# Altium PCB PCB1.PcbDoc
Units mm, origin at the board's own origin, x right, y up, seen from the top; angles counter-clockwise.
Board outline 105 x 105 mm, 2 copper layers (Top Layer, Bottom Layer); 85 components, 81 nets, 290 pads, 90 vias.
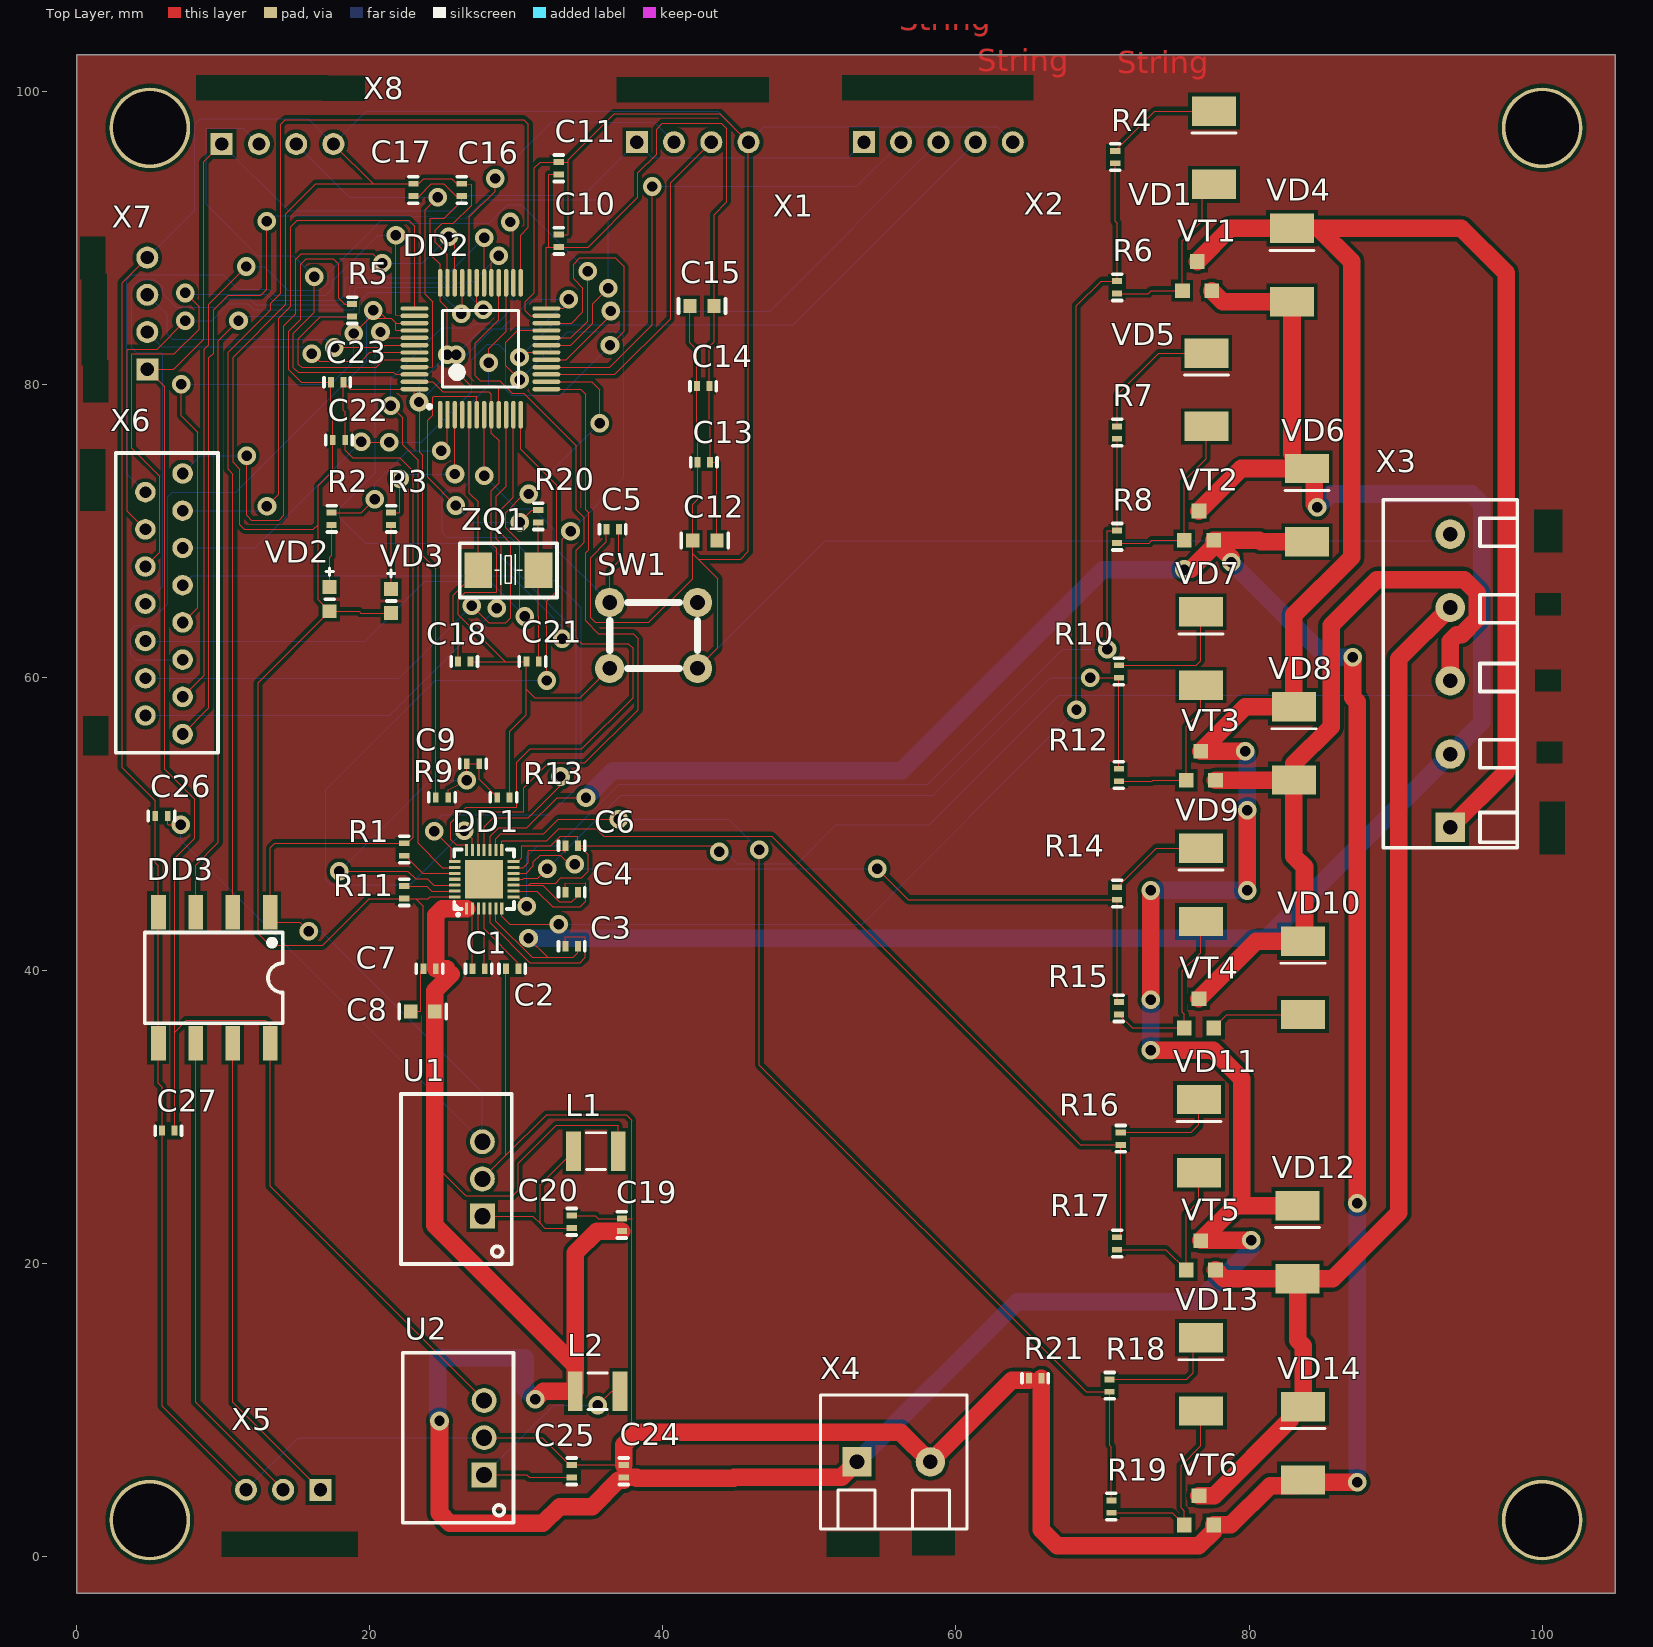
[diagram p0: Top Layer view]
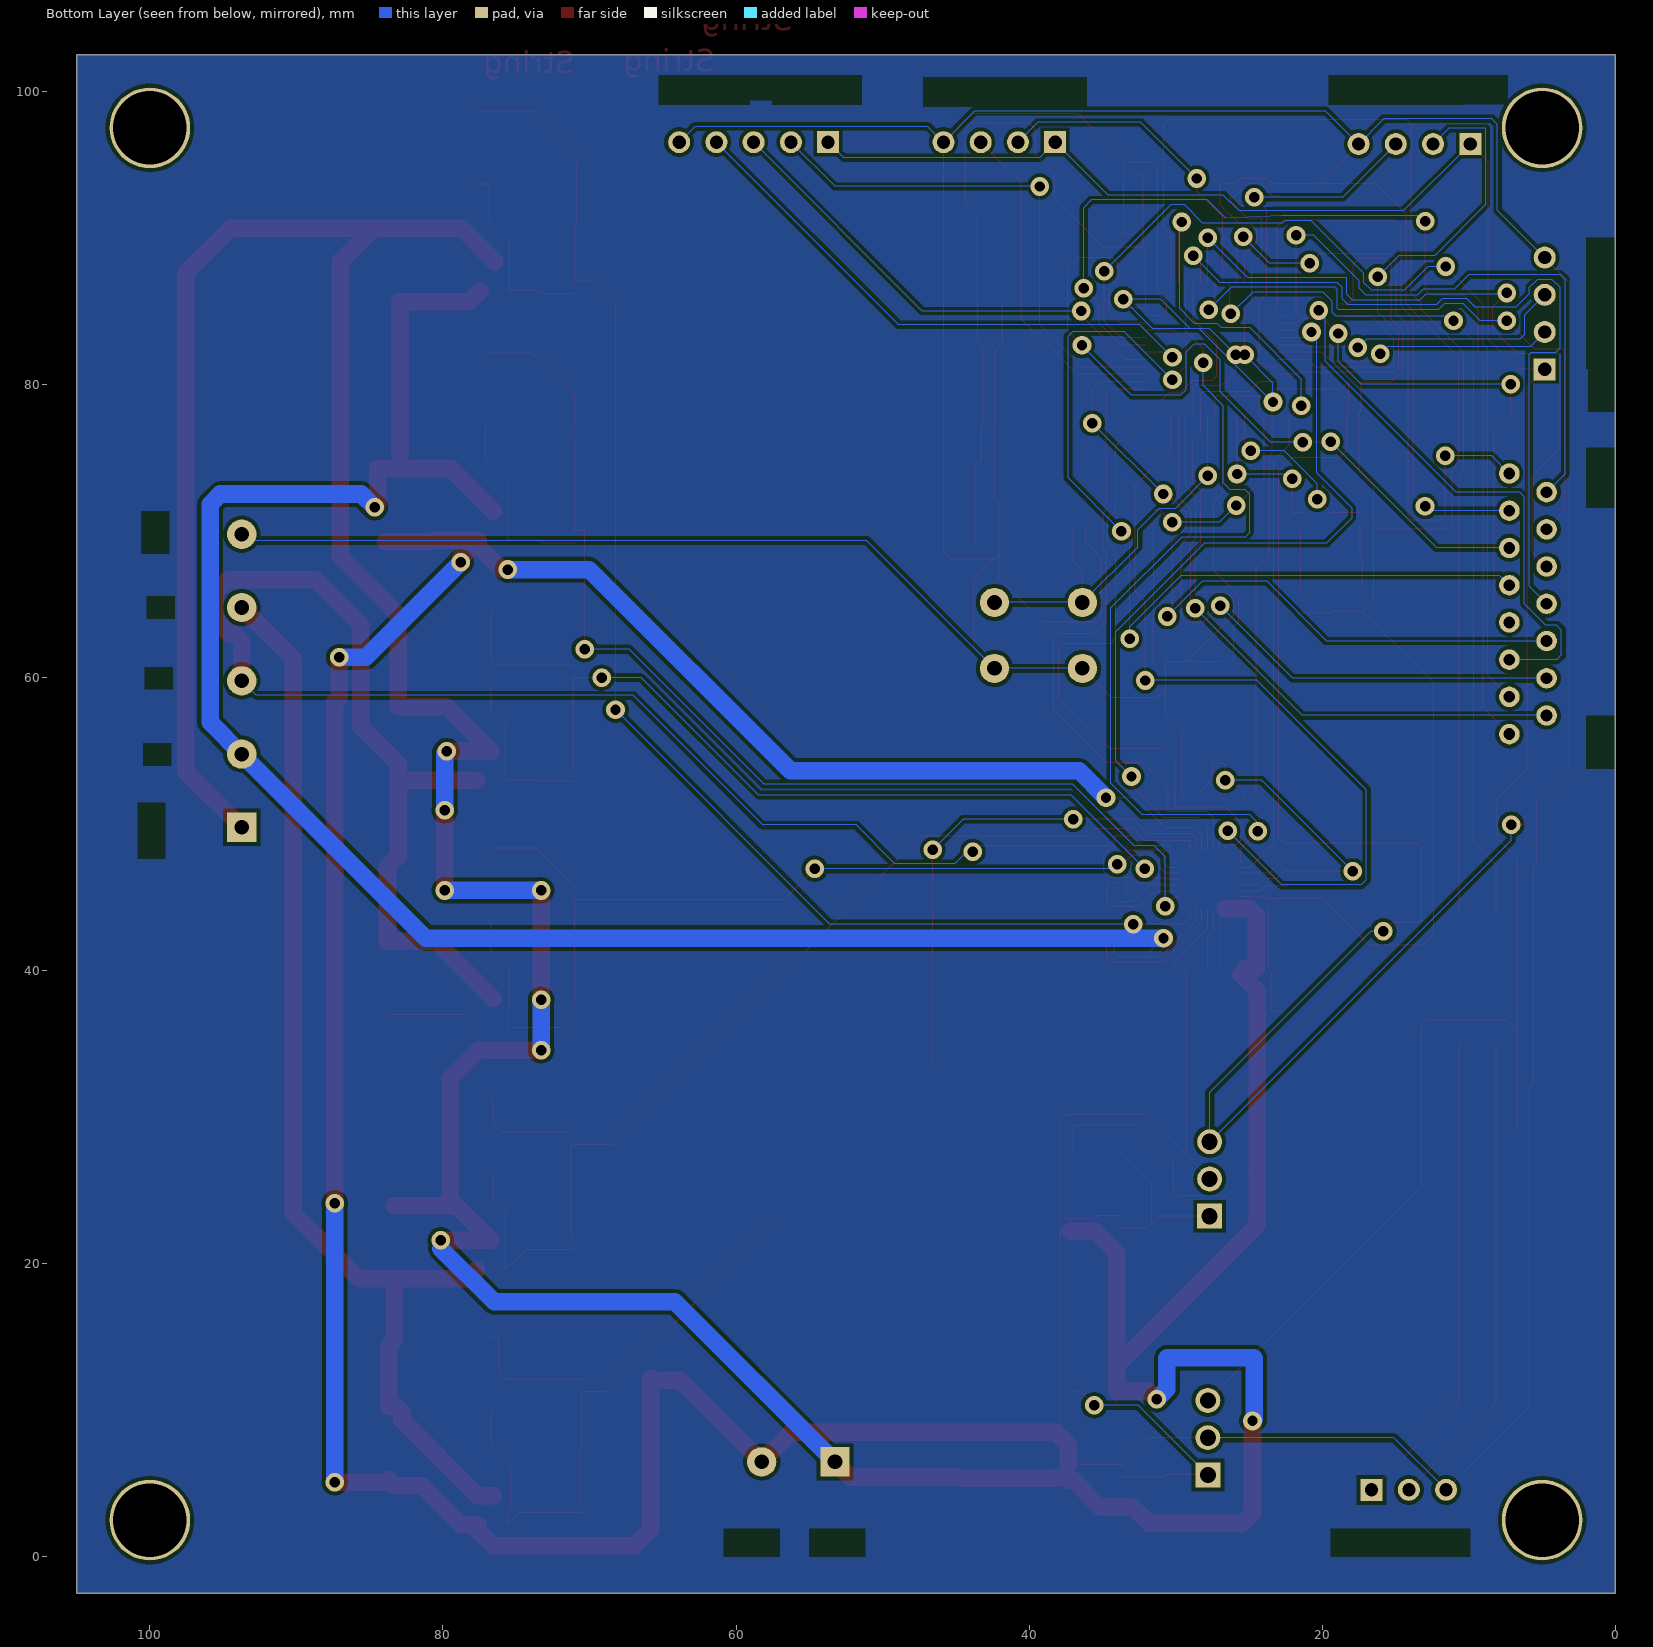
[diagram p1: Bottom Layer view, seen from below]

## Layer stack, top to bottom
Top Solder: solder mask 0.0102, Solder Resist, Dk 3.5
Top Layer: signal copper 0.0356
Dielectric 1: dielectric 0.32, FR-4, Dk 4.8
Bottom Layer: signal copper 0.0356
Bottom Solder: solder mask 0.0102, Solder Resist, Dk 3.5

## Board outline
0,-2.5 0,102.5 105,102.5 105,-2.5

## Design rules (kind name [scope] priority, off if disabled: settings)
Clearance [All] p1: gap=0.254 ignorepadtopadclearanceinfootprint=FALSE
PolygonConnect [All] p1: connectstyle=Relief reliefconductorwidth=0.254 reliefentries=4 polygonreliefangle="90 Angle" airgapwidth=0.254
RoutingVias [All] p1: holewidth=0.711 width=1.27 viastyle="Through Hole" minholewidth=0.711 minwidth=1.27 maxholewidth=0.711 maxwidth=1.27
SolderMaskExpansion [All] p1: expansion=0.102 istentingtop=FALSE
SupplyNets "Schematic Supply Nets_51" [InNet('PB10')] p1: voltage=0.000
SupplyNets "Schematic Supply Nets_50" [InNet('PB4')] p2: voltage=0.000
SupplyNets "Schematic Supply Nets_49" [InNet('PB11')] p3: voltage=0.000
SupplyNets "Schematic Supply Nets_48" [InNet('PA9')] p4: voltage=0.000
SupplyNets "Schematic Supply Nets_47" [InNet('SWDIO')] p5: voltage=0.000
SupplyNets "Schematic Supply Nets_46" [InNet('SDA2')] p6: voltage=0.000
SupplyNets "Schematic Supply Nets_45" [InNet('PA1')] p7: voltage=0.000
SupplyNets "Schematic Supply Nets_44" [InNet('PB2')] p8: voltage=0.000
SupplyNets "Schematic Supply Nets_43" [InNet('SDA1')] p9: voltage=0.000
SupplyNets "Schematic Supply Nets_42" [InNet('PA15')] p10: voltage=0.000
SupplyNets "Schematic Supply Nets_41" [InNet('PA10')] p11: voltage=0.000
SupplyNets "Schematic Supply Nets_40" [InNet('SCL1')] p12: voltage=0.000
SupplyNets "Schematic Supply Nets_39" [InNet('SCL2')] p13: voltage=0.000
SupplyNets "Schematic Supply Nets_38" [InNet('PA4')] p14: voltage=0.000
SupplyNets "Schematic Supply Nets_37" [InNet('PB3')] p15: voltage=0.000
SupplyNets "Schematic Supply Nets_36" [InNet('PB1')] p16: voltage=0.000
SupplyNets "Schematic Supply Nets_35" [InNet('SWCLK')] p17: voltage=0.000
SupplyNets "Schematic Supply Nets_34" [InNet('PA0')] p18: voltage=0.000
SupplyNets "Schematic Supply Nets_33" [InNet('PA8')] p19: voltage=0.000
SupplyNets "Schematic Supply Nets_7" [InNet('LSS')] p20: voltage=0.000
SupplyNets "Schematic Supply Nets_32" [InNet('CANH')] p21: voltage=0.000
SupplyNets "Schematic Supply Nets_31" [InNet('CAN_RX')] p22: voltage=0.000
SupplyNets "Schematic Supply Nets_2" [InNet('CANL')] p23: voltage=0.000
SupplyNets "Schematic Supply Nets" [InNet('CAN_TX')] p24: voltage=0.000
SupplyNets "Schematic Supply Nets_30" [InNet('INHC')] p25: voltage=0.000
SupplyNets "Schematic Supply Nets_29" [InNet('HPC')] p26: voltage=0.000
SupplyNets "Schematic Supply Nets_28" [InNet('+3V3')] p27: voltage=0.000
SupplyNets "Schematic Supply Nets_27" [InNet('phase_B')] p28: voltage=0.000
SupplyNets "Schematic Supply Nets_26" [InNet('GLB')] p29: voltage=0.000
SupplyNets "Schematic Supply Nets_25" [InNet('+24V')] p30: voltage=0.000
SupplyNets "Schematic Supply Nets_24" [InNet('OSC_OUT')] p31: voltage=0.000
SupplyNets "Schematic Supply Nets_23" [InNet('GHA')] p32: voltage=0.000
SupplyNets "Schematic Supply Nets_22" [InNet('GND')] p33: voltage=0.000
SupplyNets "Schematic Supply Nets_21" [InNet('HPB')] p34: voltage=0.000
SupplyNets "Schematic Supply Nets_20" [InNet('GHB')] p35: voltage=0.000
SupplyNets "Schematic Supply Nets_19" [InNet('DO')] p36: voltage=0.000
SupplyNets "Schematic Supply Nets_18" [InNet('phase_C')] p37: voltage=0.000
SupplyNets "Schematic Supply Nets_17" [InNet('INLB')] p38: voltage=0.000
SupplyNets "Schematic Supply Nets_16" [InNet('OSC_IN')] p39: voltage=0.000
SupplyNets "Schematic Supply Nets_15" [InNet('+5V')] p40: voltage=0.000
SupplyNets "Schematic Supply Nets_14" [InNet('INLC')] p41: voltage=0.000
SupplyNets "Schematic Supply Nets_13" [InNet('INHA')] p42: voltage=0.000
SupplyNets "Schematic Supply Nets_12" [InNet('DT')] p43: voltage=0.000
SupplyNets "Schematic Supply Nets_11" [InNet('INLA')] p44: voltage=0.000
SupplyNets "Schematic Supply Nets_10" [InNet('GHC')] p45: voltage=0.000
SupplyNets "Schematic Supply Nets_9" [InNet('GLA')] p46: voltage=0.000
SupplyNets "Schematic Supply Nets_8" [InNet('VDSLVL')] p47: voltage=0.000
SupplyNets "Schematic Supply Nets_6" [InNet('INHB')] p48: voltage=0.000
SupplyNets "Schematic Supply Nets_5" [InNet('phase_A')] p49: voltage=0.000
SupplyNets "Schematic Supply Nets_4" [InNet('CLK')] p50: voltage=0.000
SupplyNets "Schematic Supply Nets_3" [InNet('GLC')] p51: voltage=0.000
SupplyNets "Schematic Supply Nets_1" [InNet('HPA')] p52: voltage=0.000
Width Width_1 [All] p1: maxlimit=0.254 minlimit=0.025 preferedwidth=0.076 minimp=50.000000 maximp=50.000000 favimp=50.000000
Width [InNet('GHA')] p2: maxlimit=0.254 minlimit=0.025 preferedwidth=0.254 minimp=50.000000 maximp=50.000000 favimp=50.000000
Width Width_2 [InNet('GHB')] p3: maxlimit=0.254 minlimit=0.025 preferedwidth=0.254 minimp=50.000000 maximp=50.000000 favimp=50.000000
Width Width_3 [InNet('GHC')] p4: maxlimit=0.254 minlimit=0.025 preferedwidth=0.254 minimp=50.000000 maximp=50.000000 favimp=50.000000
Width Width_4 [InNet('GLA')] p5: maxlimit=0.254 minlimit=0.025 preferedwidth=0.254 minimp=50.000000 maximp=50.000000 favimp=50.000000
Width Width_5 [InNet('GLB')] p6: maxlimit=0.254 minlimit=0.025 preferedwidth=0.254 minimp=50.000000 maximp=50.000000 favimp=50.000000
Width Width_6 [InNet('GLC')] p7: maxlimit=0.254 minlimit=0.025 preferedwidth=0.254 minimp=50.000000 maximp=50.000000 favimp=50.000000
Width Width_7 [InNet('phase_A')] p8: maxlimit=0.254 minlimit=0.025 preferedwidth=0.254 minimp=50.000000 maximp=50.000000 favimp=50.000000
Width Width_8 [InNet('phase_B')] p9: maxlimit=0.254 minlimit=0.025 preferedwidth=0.254 minimp=50.000000 maximp=50.000000 favimp=50.000000
Width Width_9 [InNet('phase_C')] p10: maxlimit=0.254 minlimit=0.254 preferedwidth=0.254
30 further rules are at their usual default settings.

## Components (designator, comment, footprint, x,y, rotation, side; value= is the part's Value field where it differs from the comment)
C1 "470 нФ" 0402 27.432,40.132 r0 top
C2 "6.8 мкФ" 0402 29.718,40.132 r180 top
C3 "82 нФ" 0402 33.782,41.656 r0 top
C4 "82 нФ" 0402 33.782,45.339 r0 top
C5 "100 нФ" 0402 36.576,70.104 r180 top
C6 "82 нФ" 0402 33.782,48.514 r0 top
C7 "100 нФ" 0402 24.086,40.132 r180 top
C8 "10 мкФ" 0603 23.622,37.211 r180 top
C9 "100 нФ" 0402 27.051,54.102 r180 top
C10 "4.7 мкФ" 0402 32.893,89.789 r90 top
C11 "100 нФ" 0402 32.893,94.742 r90 top
C12 "1 мкФ" 0603 42.863,69.342 r180 top
C13 "100 нФ" 0402 42.799,74.676 r180 top
C14 "10 нФ" 0402 42.755,79.883 r180 top
C15 "1 мкФ" 0603 42.672,85.344 r180 top
C16 "4.7 мкФ" 0402 26.289,93.262 r90 top
C17 "100 нФ" 0402 22.987,93.262 r90 top
C18 "20 пФ" 0402 26.46,61.087 r0 top
C19 "10мкФ" 0402 37.211,22.65 r90 top
C20 "3.3 мкФ" 0402 33.782,22.86 r90 top
C21 "20 пФ" 0402 31.115,61.087 r180 top
C22 "4.7 мкФ" 0402 17.907,76.2 r180 top
C23 "100 нФ" 0402 17.78,80.137 r180 top
C24 "4.7 мкФ" 0402 37.338,5.842 r90 top
C25 "4,7 мкФ" 0402 33.782,5.842 r90 top
C26 "0.1 мкФ" 0402 5.798,50.546 r180 top
C27 "10 мкФ" 0402 6.267,29.083 r0 top
DD1 "DRV8328ARUYR" WQFN-28_L4.0-W4.0-P0.40-TL-EP2.6 27.813,46.228 r90 top
DD2 "STM32F103C8T6" "QFP48 (7x7)" 27.559,82.423 r90 top
DD3 "ISO1050DUBR" SOIC-8_L9.3-W6.6-P2.54-LS10.4-BL 9.398,39.497 r180 top
L1 "Inductance" 1210 35.433,27.686 r180 top
L2 "Inductance" 1210 35.56,11.303 r0 top
R1 "5.11К" 0402 22.352,48.26 r90 top
R2 "510" 0402 17.399,70.822 r90 top
R3 "510" 0402 21.463,70.822 r90 top
R4 "30" 0402 70.866,95.504 r90 top
R5 "100K" 0402 18.796,85.046 r90 top
R6 "140" 0402 70.993,86.614 r270 top
R7 "30" 0402 70.993,76.708 r90 top
R8 "140" 0402 70.993,69.596 r270 top
R9 "3.83" 0402 24.936,51.816 r180 top
R10 "30" 0402 71.12,60.408 r90 top
R11 "110К" 0402 22.352,45.339 r90 top
R12 "140" 0402 71.12,53.34 r270 top
R13 "1" 0402 29.127,51.816 r180 top
R14 "30" 0402 70.993,45.256 r90 top
R15 "140" 0402 71.12,37.421 r270 top
R16 "30" 0402 71.247,28.531 r90 top
R17 "140" 0402 70.993,21.38 r270 top
R18 "30" 0402 70.485,11.684 r90 top
R19 "140" 0402 70.612,3.429 r270 top
R20 "47" 0402 31.496,70.993 r90 top
R21 "R056" 0402 65.405,12.192 r180 top
SW1 "Buttom" TaktButton 39.37,62.865 r90 top
U1 "R-783.3-0.5" PWRM-TH_3P-L11.5-W7.6-P2.54_R-785.0-0.5 27.686,25.781 r90 top
U2 "R-783.3-0.5" PWRM-TH_3P-L11.5-W7.6-P2.54_R-785.0-0.5 27.813,8.128 r90 top
VD1 "Shottki" DO214AA 77.597,96.139 r270 top
VD2 "LED" 0603polar 17.272,65.342 r270 top
VD3 "LED" 0603polar 21.463,65.214 r270 top
VD4 "Shottki" DO214AA 82.931,88.138 r270 top
VD5 "Shottki" DO214AA 77.089,79.629 r270 top
VD6 "Shottki" DO214AA 83.947,71.755 r270 top
VD7 "Shottki" DO214AA 76.708,61.976 r270 top
VD8 "Shottki" DO214AA 83.058,55.499 r270 top
VD9 "Shottki" DO214AA 76.708,45.847 r270 top
VD10 "Shottki" DO214AA 83.693,39.497 r270 top
VD11 "Shottki" DO214AA 76.581,28.702 r270 top
VD12 "Shottki" DO214AA 83.312,21.463 r270 top
VD13 "Shottki" DO214AA 76.708,12.446 r270 top
VD14 "Shottki" DO214AA 83.693,7.747 r270 top
VT1 "N-MOSFET" SOT23 76.454,87.376 r180 top
VT2 "N-MOSFET" SOT23 76.581,70.358 r180 top
VT3 "N-MOSFET" SOT23 76.708,53.975 r180 top
VT4 "N-MOSFET" SOT23 76.581,37.084 r180 top
VT5 "N-MOSFET" SOT23 76.708,20.574 r180 top
VT6 "N-MOSFET" SOT23 76.581,3.175 r180 top
X1 "4pin" HU4 42.037,96.52 r0 top
X2 "5pin" HU5 58.801,96.52 r0 top
X3 "Вывод" PCBComponent_1#1 93.726,49.77 r90 top
X4 "2pin" 2pin5mmVintKlemm 55.753,6.477 r0 top
X5 "Клеммник, 3pin, 3.5мм" HU3 14.097,4.572 r180 top
X6 "Component_1" PCBComponent_1#2 4.699,65.024 r90 top
X7 "4pin" HU4 4.826,84.836 r90 top
X8 "4pin" HU4 13.716,96.393 r0 top
ZQ1 "-" OSC-SMD_L5.0-W3.2 29.464,67.31 r180 top

## Footprints (in the part's own frame and the unit in brackets; to place one, negate y for a bottom-side part, rotate by r counter-clockwise, add the part's x,y. Pads: shape width x height; smd on the part's side, far side on the other; paste and mask are expansions set on the pad)
2pin5mmVintKlemm [mm]
  rect 2x2 hole 1: 1(-2.5,0)
  round 2 hole 1: 2(2.5,0)
  round 0.5 on Mech1: 13(-4.4,-3.9)
  silkscreen extent -5,-4.57 5,4.57, body extent -5.08,-4.44 5.08,4.56, height 12.5
0402 [mm]
  rect 0.4x0.7 smd: 1(-0.425,0) 2(0.425,0)
  silkscreen extent -0.9,-0.3 0.9,0.3, body extent -0.5,-0.25 0.5,0.25, height 0.3
0603 [mm]
  rect 0.9x0.95 smd: 1(-0.825,0) 2(0.825,0)
  silkscreen extent -1.6,-0.5 1.6,0.5, body extent -0.8,-0.43 0.8,0.43, height 0.3
0603polar [mm]
  rect 0.95x0.95 smd: 1(-0.825,0) 2(0.825,0)
  silkscreen extent -2.13,-0.3 0,0.3, body extent -0.8,-0.43 0.8,0.43, height 0.3
1210 [mm]
  rect 1x2.7 smd: 1(-1.525,0) 2(1.525,0)
  silkscreen extent -0.65,-1.25 0.65,1.25, body extent -1.55,-1.3 1.55,1.3, height 0.5
DO214AA [mm]
  rect 2x3 smd: 1(-2.5,0) 2(2.5,0)
  silkscreen extent -1,-1.5 -1,1.5, body extent -2.5,-2 2.5,2, height 2.6
HU3 [mm]
  rect 1.5x1.5 hole 0.9: 1(-2.54,0)
  round 1.5 hole 0.9: 2(0,0) 3(2.54,0)
  body extent -3.81,-3.3 3.81,2.7, height 11
HU4 [mm]
  rect 1.5x1.5 hole 0.9: 1(-3.81,0)
  round 1.5 hole 0.9: 2(-1.27,0) 3(1.27,0) 4(3.81,0)
  body extent -5.08,-3.3 5.08,2.7, height 11
HU5 [mm]
  rect 1.5x1.5 hole 0.9: 1(-5.08,0)
  round 1.5 hole 0.9: 2(-2.54,0) 3(0,0) 4(2.54,0) 5(5.08,0)
  body extent -6.35,-3.3 6.35,2.7, height 11
OSC-SMD_L5.0-W3.2 [mm]
  rect 1.9x2.4 smd: 1(-2.05,0) 2(2.05,0)
  silkscreen extent -3.33,-1.85 3.33,1.85, body extent -2.56,-1.66 2.53,1.63, height 2
PCBComponent_1#1 [mm]
  rect 2x2 hole 1 mask+0.076: 1(0,0)
  round 2 hole 1 mask+0.076: 2(5,0) 3(10,0) 4(15,0) 5(20,0)
  silkscreen extent -1.4,-4.57 22.35,4.57, body extent -1.79,-4.56 23.38,4.45, height 12.01
PCBComponent_1#2 [mm]
  round 1.4 hole 0.8: 1(-7.62,0) 2(-5.08,0) 3(-2.54,0) 4(0,0) 5(2.54,0) 6(5.08,0) 7(7.62,0) 8(-8.89,-2.54) 9(-6.35,-2.54) 10(-3.81,-2.54) 11(-1.27,-2.54) 12(1.27,-2.54) 13(3.81,-2.54) 14(6.35,-2.54) 15(8.89,-2.54)
  silkscreen extent -10.16,-4.95 10.29,2.03, body extent -11,-5.33 11,2.67, height 11
PWRM-TH_3P-L11.5-W7.6-P2.54_R-785.0-0.5 [mm]
  rect 1.7x1.7 hole 1.1: 1(-2.54,0)
  round 1.7 hole 1.1: 2(0,0) 3(2.54,0)
  silkscreen extent -5.8,-2 5.8,5.55, body extent -5.97,-2.03 5.71,5.59, height 10.2
"QFP48 (7x7)" [mm]
  oval 1.9x0.3 smd: 1(-4.5,2.75) 2(-4.5,2.25) 3(-4.5,1.75) 4(-4.5,1.25) 5(-4.5,0.75) 6(-4.5,0.25) 7(-4.5,-0.25) 8(-4.5,-0.75) 9(-4.5,-1.25) 10(-4.5,-1.75) 11(-4.5,-2.25) 12(-4.5,-2.75) 25(4.5,-2.75) 26(4.5,-2.25) 27(4.5,-1.75) 28(4.5,-1.25) 29(4.5,-0.75) 30(4.5,-0.25) 31(4.5,0.25) 32(4.5,0.75) 33(4.5,1.25) 34(4.5,1.75) 35(4.5,2.25) 36(4.5,2.75)
  oval 0.3x1.9 smd: 13(-2.75,-4.5) 14(-2.25,-4.5) 15(-1.75,-4.5) 16(-1.25,-4.5) 17(-0.75,-4.5) 18(-0.25,-4.5) 19(0.25,-4.5) 20(0.75,-4.5) 21(1.25,-4.5) 22(1.75,-4.5) 23(2.25,-4.5) 24(2.75,-4.5) 37(2.75,4.5) 38(2.25,4.5) 39(1.75,4.5) 40(1.25,4.5) 41(0.75,4.5) 42(0.25,4.5) 43(-0.25,4.5) 44(-0.75,4.5) 45(-1.25,4.5) 46(-1.75,4.5) 47(-2.25,4.5) 48(-2.75,4.5)
  silkscreen extent -4.07,-2.6 2.6,3.6, body extent -3.5,-3.5 3.5,3.5, height 1.6
SOIC-8_L9.3-W6.6-P2.54-LS10.4-BL [mm]
  rect 1x2.35 smd: 1(-3.81,-4.471) 2(-1.27,-4.471) 3(1.27,-4.471) 4(3.81,-4.471) 5(3.81,4.471) 6(1.27,4.471) 7(-1.27,4.471) 8(-3.81,4.471)
  silkscreen extent -4.67,-3.1 4.73,3.1, body extent -4.64,-3.31 4.64,3.31, height 2.65
SOT23 [mm]
  rect 1x1 smd: 1(1,1) 2(-1,1) 3(0,-1)
  body extent -1.5,-0.5 1.5,0.5, height 1
TaktButton [mm]
  round 2 hole 1: 1(-2.25,3) 1(-2.25,-3) 2(2.25,3) 2(2.25,-3)
  silkscreen extent -2.25,-3 2.25,3, body extent -3,-3.99 3,3.99, height 4.3
WQFN-28_L4.0-W4.0-P0.40-TL-EP2.6 [mm]
  rect 0.8x0.21 smd paste-100 mask+0.051: 1(-2,1.2) 2(-2,0.8) 3(-2,0.4) 4(-2,0) 5(-2,-0.4) 6(-2,-0.8) 7(-2,-1.2) 15(2,-1.2) 16(2,-0.8) 17(2,-0.4) 18(2,0) 19(2,0.4) 20(2,0.8) 21(2,1.2)
  rect 0.21x0.8 smd paste-100 mask+0.051: 8(-1.2,-2) 9(-0.8,-2) 10(-0.4,-2) 11(0,-2) 12(0.4,-2) 13(0.8,-2) 14(1.2,-2) 22(1.2,2) 23(0.8,2) 24(0.4,2) 25(0,2) 26(-0.4,2) 27(-0.8,2) 28(-1.2,2)
  rect 2.6x2.6 smd paste-100 mask+0.051: 29(0,0)
  silkscreen extent -2.51,-2.03 2.03,2.03, body extent -2,-2 2,2, height 0.5

## Part data
C1 C2 C3 C4 C5 C6 C7 C8 C9 C10 C11 C12 C13 C14 C15 C16 C17 C18 C19 C20 C21 C22 C23 C24 C25 C26 C27: library part Capicator
DD1: JLCPCB Part Class="Extended Part", LCSC Part Name="无刷直流BLDC电机驱动芯片 60V", Manufacturer=TI(德州仪器), Add into BOM=yes, Convert to PCB=yes, Datasheet=https://www.ti.com/cn/lit/gpn/drv8328, Device=DRV8328ARUYR, Manufacturer Part=DRV8328ARUYR, Supplier=LCSC, Supplier Footprint=WQFN-28(4x4), Supplier Part=C3681415, Symbol=DRV8328ARUYR
DD3: Current - Supply=73mA, Isolation Voltage(Vrms)=2500, JLCPCB Part Class="Extended Part", LCSC Part Name="1Mbps 3V~5.5V", Manufacturer=TI(德州仪器), Operating Temperature=-55℃~+105℃, Voltage - Supply (Bus)=4.75V~5.25V, Voltage - Supply (Logic)=3V~5.5V, Add into BOM=yes, CMTI(kV/us)=50kV/us, Convert to PCB=yes, Data Rate(Max)=1Mbps, Datasheet=https://www.ti.com/cn/lit/gpn/iso1050, Device=ISO1050DUBR, Manufacturer Part=ISO1050DUBR, Number of Channels=1, Supplier=LCSC, Supplier Footprint=SOP-8, Supplier Part=C16428, Symbol=ISO1050DUBR
R1 R2 R3 R4 R5 R6 R7 R8 R9 R10 R11 R12 R13 R14 R15 R16 R17 R18 R19 R20 R21: library part Resistor, TU=ШКАБ.434110.002ТУ
U1 U2: JLCPCB Part Class="Extended Part", Manufacturer="Recom Power", Output Current(Max)=500mA, Output Power=2W, Output Voltage=3.3V, Voltage - Supply=4.75V~32V, Add into BOM=yes, Conversion Efficiency=91%, Convert to PCB=yes, Datasheet=https://item.szlcsc.com/datasheet/R-783.3-0.5/7321607.html, Device=R-783.3-0.5, LCSC Part Name=R-783.3-0.5, Manufacturer Part=R-783.3-0.5, Number of Channels=1, Supplier=LCSC, Supplier Footprint=SIP,11.5x7.5mm, Supplier Part=C6371749, Symbol=R-783.3-0.5
VT1 VT2 VT3 VT4 VT5 VT6: library part MOSFET-N
X1 X7 X8: "Клеммник винтовой, 4пина, шаг 5мм", Case="НЕТ ДАННЫХ", HelpURL="НЕТ ДАННЫХ", LineName1=+5В, LineName4="Общий провод", PartNumber="НЕТ ДАННЫХ", Reference="НЕТ ДАННЫХ", Type="Разъем на плату"
  X1: LineName2=DO, LineName3=CLK
  X7 X8: LineName2=SDA, LineName3=SCL
X2: "Пружинный клеммник, 5 пинов, шаг 2.54мм", Case="НЕТ ДАННЫХ", HelpURL="НЕТ ДАННЫХ", LineName1=+5В, LineName2="Датчик Холла А", LineName3="Датчик Холла В", LineName4="Датчик Холла С", LineName5="Общий провод", PartNumber="НЕТ ДАННЫХ", Reference="НЕТ ДАННЫХ", Type="Разъем на плату"
X4: "Клеммник винтовой, 2 пина, шаг 5мм", Case="НЕТ ДАННЫХ", HelpURL="НЕТ ДАННЫХ", LineName1=+24В, LineName2="Общий провод", PartNumber="НЕТ ДАННЫХ", Reference="НЕТ ДАННЫХ", Type="Разъем на плату"
X5: library part 3pin, "Клеммник винтовой, 3-контактный, 3.5мм", Case="НЕТ ДАННЫХ", PartNumber="KLS2-350-3.50-03P-4S (ED350V-03P)", HelpURL="НЕТ ДАННЫХ", LineName1=CANH, LineName2=CANL, LineName3="Общий проврд", Reference=https://www.chipdip.ru/product/kls2-350-3.50-03p-4s-ed350v-03p, Type="Разъем на плату"
ZQ1: library part NX5032GA-8MHZ-STD-CSK-7_C156253, JLCPCB Part Class="Extended Part", LCSC Part Name="NX5032GA 8MHZ 8pF ±30ppm -40℃~+85℃", Manufacturer=NDK, Manufacturer Part=NX5032GA-8MHZ-STD-CSK-7, Add into BOM=yes, Convert to PCB=yes, Datasheet=https://item.szlcsc.com/datasheet/NX5032GA-8MHZ-STD-CSK-7/167596.html, Device=NX5032GA-8MHZ-STD-CSK-7_C156253, Load Capacitance=-, Operating Temperature=-, Supplier=LCSC, Supplier Footprint=SMD5032-2P, Supplier Part=C156253, Symbol=NX5032GA-8MHZ(STD-CSK-7), Type=-
VD2 VD3: Green Example="GNL-3012GD    3mm, 5mA"

## Free pads (board coordinates)
  round 5.5 hole 5: 3(5,97.5) 4(100,97.5) 5(100,2.5) 6(5,2.5)

## Via types
v1: diameter 1.27, hole 0.711, Top Layer to Bottom Layer, 90 vias

## Nets (pads, with @x,y where several pads share a name; then routed paths per layer and width w, separated by ;. In a path a pad name is that pad's centre, name@x,y a point inside that pad or via, vN(x,y) a via of type N, cw(c..) or ccw(c..) an arc to the next point about the centre after c; other vN are vias at no path point)
+3V3: C10.1 C11.1 C12.1 C13.1 C14.1 C15.1 C16.1 C17.1 C22.1 C23.1 C26.1 DD2.9 DD2.24 DD2.36 DD2.48 DD3.1 R1.2 R9.2 U1.3 | length 246.6
  Top Layer w0.076: C26.1 6.223,49.987 6.248,49.962 v1(7.112,49.962) ; v1(15.85,42.672) 15.24,43.282 13.208,43.282 DD3.1 13.208,48.367 13.525,48.685 R1.2 22.555,48.685 22.974,49.104 22.974,74.079 22.064,74.99 18.844,74.99 18.332,75.501 C22.1 18.332,78.105 18.205,78.232 C23.1 18.669,79.673 DD2.48@23.038,79.673 ; C17.1 23.368,92.837 24.219,93.688 25.057,93.688 25.908,92.837 C16.1 26.289,92.529 25.086,91.326 24.181,91.326 24.143,91.288 24.143,88.849 24.809,88.183 DD2.36 24.809,85.674 25.298,85.185 v1(25.298,82.017) ; v1(23.368,78.791) 23.038,79.121 DD2.48@23.038,79.673 ; R9.2 24.511,67.412 23.635,68.288 23.635,75.148 23.419,75.364 23.419,79.673 DD2.48 DD2.48@23.038,79.673 ; v1(25.906,82.018) 25.906,80.901 26.899,79.908 28.651,79.908 28.809,79.751 DD2.9 ; C11.1 32.258,94.317 32.233,94.292 32.233,89.389 32.258,89.364 ; v1(33.579,85.808) 33.579,85.541 33.21,85.173 DD2.24 32.055,85.173 32.055,89.339 32.08,89.364 32.258,89.364 ; C12.1 43.688,74.651 43.663,74.676 C13.1 43.224,77.241 43.18,77.285 C14.1 43.18,82.601 43.497,82.918 C15.1 43.497,91.579 44.374,92.456 44.374,97.447 44.005,97.815 39.98,97.815 39.573,97.409 39.573,95.702 38.3,94.429 38.3,92.75 34.914,89.364 C10.1 32.258,89.364
  Bottom Layer w0.076: v1(7.112,49.962) 7.112,48.895 U1.3 27.686,31.686 16.7,42.672 v1(15.85,42.672) ; v1(25.298,82.017) 23.368,80.086 v1(23.368,78.791) 28.384,83.807 ; v1(25.906,82.018) 27.696,83.807 28.384,83.807 ; 28.384,83.807 29.019,83.807 ; 29.019,83.807 31.578,83.807 v1(33.579,85.808) 31.02,85.808 29.019,83.807
+5V: C27.2 DD3.8 U2.3 X1.1 X2.1 X7.1 X8.1 | length 159.6
  Top Layer w0.076: C27.2 6.692,35.8 ; X8.1 8.687,95.174 8.687,83.071 6.642,81.026 X7.1 6.021,79.831 6.021,53.745 8.061,51.705 8.061,49.024 6.692,47.655 6.692,35.8 ; U2.3 13.208,25.273 DD3.8 13.208,36.284 12.89,36.601 7.493,36.601 6.692,35.8
  Bottom Layer w0.076: X8.1 14.465,91.834 23.381,91.834 23.386,91.828 25.667,91.828 26.751,92.913 34.62,92.913 X1.1 39.294,95.453 52.654,95.453 X2.1
+24V: C7.1 C8.1 C19.1 C24.1 DD1.1 L1.1 L2.1 VD4.1 VD8.1 VD12.1 VT1.3 VT3.3 VT5.3 X3.1 X4.1 | length 319.3
  Top Layer w0.076: 24.447,26.734 26.543,24.638 29.769,24.638 30.15,25.019 30.15,26.848 32.741,29.439 36.933,29.439 36.958,29.413 L1.1 ; L2.1@34.035,10.465 L2.1 ; VT5.3 VT5.3@76.724,21.59
  Top Layer w0.1: 25.273,40.132 25.568,39.837 25.568,39.754
  Top Layer w1.2: v1(24.765,9.271) 24.765,2.989 25.468,2.286 31.819,2.286 32.962,3.429 35.179,3.429 36.963,5.213 37.338,5.213 ; 25.273,40.132 C7.1 24.511,43.784 24.956,44.228 DD1.1 ; 25.568,39.754 24.511,38.697 24.447,38.633 C8.1 24.447,26.734 24.447,22.619 34.035,13.031 ; v1(31.293,10.744) 31.852,11.303 L2.1 34.035,13.031 ; C19.1 35.509,22.225 34.035,20.751 34.035,13.031 ; C24.1 38.204,5.417 ; 38.204,5.375 44.845,5.375 44.887,5.417 52.193,5.417 X4.1 ; v1(73.304,34.569) 77.546,34.569 79.502,32.614 79.502,23.963 ; v1(73.304,37.998) v1(73.304,45.466) ; VT1.3 78.716,90.638 VD4.1 84.734,90.638 ; v1(79.74,54.975) VT3.3 79.732,57.999 VD8.1 83.058,64.262 86.995,68.199 86.995,88.377 84.734,90.638 ; v1@79.883,45.621 v1(79.883,50.927) ; v1(80.137,21.59) 76.724,21.59 79.097,23.963 79.502,23.963 ; VD12.1 79.502,23.963 ; X3.1 97.536,53.58 97.536,87.592 94.49,90.638 84.734,90.638
  Bottom Layer w0.076: 24.638,13.544 24.683,13.589 ; 30.562,13.589 30.607,13.544 ; v1(79.74,54.975) v1@79.883,54.832
  Bottom Layer w0.254: v1@80.137,21.031 v1(80.137,21.59)
  Bottom Layer w1.2: 24.638,13.544 24.638,9.398 v1(24.765,9.271) ; 24.683,13.589 30.562,13.589 ; 30.607,13.544 30.607,11.43 v1(31.293,10.744) ; X4.1 64.175,17.399 76.505,17.399 v1@80.137,21.031 ; v1(73.304,34.569) v1(73.304,37.998) ; v1(73.304,45.466) v1(79.883,45.466) ; v1(79.883,50.927) v1@79.883,54.832
CAN_RX: DD2.25 DD3.2 | length 83.6
  Top Layer w0.076: DD3.2 10.668,73.876 10.351,74.193 10.351,82.191 13.245,85.085 13.245,85.545 13.919,86.22 13.919,97.727 14.237,98.044 30.518,98.044 30.836,97.727 30.836,90.703 30.309,90.177 DD2.25
CAN_TX: DD2.33 DD3.3 | length 60.8
  Top Layer w0.076: DD3.3 8.128,47.193 9.677,48.743 9.677,82.956 v1(11.049,84.328) ; v1(26.238,84.803) 26.309,84.873 DD2.33
  Bottom Layer w0.076: v1(11.049,84.328) 11.367,84.645 19.037,84.645 19.317,84.925 19.317,85.661 19.939,86.284 24.757,86.284 v1(26.238,84.803)
CANH: DD3.7 X5.1 | length 32.9
  Top Layer w0.076: DD3.7 10.668,10.541 X5.1
CANL: DD3.6 X5.2 | length 32.9
  Top Layer w0.076: DD3.6 8.128,10.541 X5.2
CLK: DD2.15 X1.3 | length 23.2
  Top Layer w0.076: DD2.15 36.736,80.673 40.534,84.471 40.534,93.747 X1.3
DO: DD2.32 X1.2 | length 22.2
  Top Layer w0.076: DD2.32 26.809,91.427 28.562,93.181 v1(28.562,94.043)
  Bottom Layer w0.076: v1(28.562,94.043) 32.385,97.866 39.421,97.866 X1.2
DT: DD1.27 R11.2 | length 3.6
  Top Layer w0.076: R11.2 23.901,45.764 24.237,45.428 DD1.27
GHA: DD1.7 R4.1 R6.1 | length 85.1
  Top Layer w0.076: DD1.7 29.013,43.713 29.559,43.167 v1(32.906,43.167) ; v1(68.224,57.797) 68.224,85.344 69.919,87.039 R6.1 70.993,90.983 70.866,91.11 R4.1
  Bottom Layer w0.076: v1(32.906,43.167) 53.595,43.167 v1(68.224,57.797)
GHB: DD1.11 R10.1 R12.1 | length 53.2
  Top Layer w0.076: DD1.11 30.436,46.228 30.505,46.298 31.464,46.298 v1(32.106,46.939) ; v1(69.164,59.983) R10.1 R12.1
  Bottom Layer w0.076: v1(32.106,46.939) 37.135,51.968 58.457,51.968 66.472,59.983 v1(69.164,59.983)
GHC: DD1.15 R16.1 R17.1 | length 58.5
  Top Layer w0.076: DD1.15 29.013,48.819 29.051,48.857 32.067,48.857 32.893,49.682 35.454,49.682 35.962,49.174 47.418,49.174 68.486,28.106 R16.1 71.247,22.059 R17.1
GLA: DD1.8 R7.1 R8.1 | length 65
  Top Layer w0.076: DD1.8 30.099,45.028 v1(30.731,44.396) ; v1(70.333,61.925) 70.333,69.996 70.358,70.021 R8.1 R7.1
  Bottom Layer w0.076: v1(30.731,44.396) 30.731,47.762 31.483,48.514 32.829,48.514 37.043,52.727 58.087,52.727 67.285,61.925 v1(70.333,61.925)
GLB: DD1.12 R14.1 R15.1 | length 50.2
  Top Layer w0.076: DD1.12 30.67,46.628 31.178,47.136 31.178,47.422 31.623,47.866 33.009,47.866 33.612,47.263 v1(33.991,47.263) ; v1(54.629,46.946) 56.744,44.831 R14.1 70.993,37.846 R15.1
  Bottom Layer w0.076: v1(33.991,47.263) 34.309,46.946 v1(54.629,46.946)
GLC: DD1.16 R18.1 R19.1 | length 75.4
  Top Layer w0.076: DD1.16 28.613,48.984 28.956,49.327 31.877,49.327 32.868,50.317 v1(36.982,50.317) ; v1(46.584,48.247) 46.584,33.553 68.878,11.259 R18.1 70.485,7.62 70.612,7.493 R19.1
  Bottom Layer w0.076: v1(36.982,50.317) 44.514,50.317 v1(46.584,48.247)
GND: C2.2 C5.2 C7.2 C8.2 C10.2 C11.2 C12.2 C13.2 C14.2 C15.2 C16.2 C17.2 C18.2 C19.2 C20.2 C21.2 C22.2 C23.2 C24.2 C25.2 C26.2 C27.1 DD1.28 DD2.8 DD2.23 DD2.35 DD2.47 DD3.4 DD3.5 R5.2 R11.1 R13.1 R21.2 SW1.1 U1.2 U2.2 VD2.2 VD3.2 X1.4 X2.5 X3.5 X4.2 X5.3 X7.4 X8.4 | length 627.9
  Top Layer w0.076: X7.4 3.123,86.943 3.123,53.849 5.373,51.599 C26.2 5.373,47.357 5.588,47.142 DD3.4 DD3.5 5.588,32.309 5.842,32.055 C27.1 5.842,10.287 X5.3 ; X8.4 20.232,93.687 ; R5.2 18.288,85.471 17.882,85.877 17.882,88.201 17.513,88.57 15.659,88.57 15.291,88.201 15.291,84.455 14.465,83.629 14.465,80.988 15.316,80.137 C23.2 17.355,78.232 17.482,78.105 C22.2 17.482,74.073 16.485,73.076 16.485,70.421 ; VD3.2 19.407,64.389 19.279,64.517 VD2.2 ; C8.2 23.45,37.211 23.495,37.256 23.495,39.775 23.499,39.78 23.499,39.97 C7.2 23.661,44.386 23.134,44.914 ; DD2.47 24.308,80.173 24.977,79.504 28.117,79.504 28.309,79.311 DD2.8 28.309,76.657 28.829,76.137 28.829,73.279 28.296,72.746 28.296,69.132 28.656,68.772 28.656,65.848 28.626,65.818 26.524,65.818 26.048,65.341 26.048,64.275 29.235,61.087 ; DD2.35 25.309,88.841 24.473,89.677 24.473,90.513 24.956,90.995 25.717,90.995 26.949,92.227 26.949,93.662 C16.2 25.933,93.687 25.602,94.018 23.674,94.018 23.343,93.687 C17.2 20.232,93.687 ; DD1.28 24.117,45.028 24.003,44.914 23.134,44.914 ; C18.2 29.235,61.087 ; U1.2 29.293,27.388 ; U2.2 31.771,8.128 ; C2.2 29.293,27.388 ; R13.1 29.552,56.317 30.69,57.455 30.69,59.182 ; DD2.23 30.961,84.673 30.607,85.026 30.607,85.649 31.217,86.258 31.217,94.761 31.623,95.167 C11.2 33.528,95.167 33.553,95.142 ; C10.2 33.528,90.214 33.553,90.239 33.553,95.142 ; C25.2@33.632,6.267 C25.2 C24.2 ; C20.2 35.382,23.285 35.592,23.075 C19.2 37.871,23.075 37.897,23.05 ; C5.2 36.151,69.254 35.077,68.18 35.077,64.072 35.395,63.754 39.052,63.754 42.038,66.74 42.038,68.452 ; SW1.1@36.37,60.615 34.378,58.623 31.249,58.623 30.69,59.182 ; 37.897,8.204 37.897,23.05 ; C15.2 41.847,82.83 42.33,82.347 C14.2 42.33,77.285 42.374,77.241 C13.2 42.374,72.167 42.038,71.831 C12.2 42.038,68.452 ; SW1.1@42.37,60.615 43.764,62.009 43.764,66.726 42.418,68.072 ; R21.2@64.98,12.04 R21.2 ; 16.485,70.421 16.167,70.104 11.455,70.104 11.151,70.409 11.151,74.219 10.681,74.689 10.681,81.861 14.275,85.455 14.275,91.63 16.332,93.687 20.232,93.687 ; 16.485,70.421 16.485,65.304 VD2.2 ; VD2.2 12.395,59.64 12.395,42.52 13.181,41.734 16.786,41.734 19.966,44.914 R11.1 23.134,44.914 ; 29.235,61.087 C21.2 30.69,59.182 ; 29.293,27.388 32.08,30.175 37.503,30.175 37.897,29.781 37.897,23.05 ; 33.553,95.142 33.553,95.326 36.703,98.476 43.891,98.476 X1.4 45.847,68.605 45.314,68.072 42.418,68.072 ; 42.038,68.452 42.418,68.072
  Top Layer w0.077: 31.771,8.128 C25.2@33.632,6.267
  Top Layer w0.254: 37.897,8.204 38.202,8.509
  Top Layer w1.2: C24.2 37.338,7.645 37.897,8.204 ; 38.202,8.509 46.717,8.509 56.221,8.509 X4.2 63.816,12.04 R21.2@64.98,12.04
  Bottom Layer w0.076: X7.4 8.052,91.872 8.052,97.727 8.433,98.108 15.811,98.108 X8.4 19.761,98.628 43.739,98.628 X1.4 46.914,97.587 62.814,97.587 X2.5 ; X5.3 15.113,8.128 U2.2 ; SW1.1@36.37,60.615 42.37,60.615 51.097,69.342 93.082,69.342 X3.5@93.51,69.77
  Bottom Layer w1.2: X3.5@93.51,69.77 X3.5
HPA: DD2.16 X2.2 | length 36.1
  Top Layer w0.076: DD2.16 36.382,81.173 39.268,84.06 v1(39.268,93.497)
  Bottom Layer w0.076: v1(39.268,93.497) 53.238,93.497 X2.2
HPB: DD2.17 X2.3 | length 33.1
  Top Layer w0.076: DD2.17 33.418,81.673 36.449,84.704 v1(36.449,85.001)
  Bottom Layer w0.076: v1(36.449,85.001) 47.282,85.001 X2.3
HPC: DD2.18 X2.4 | length 39.2
  Top Layer w0.076: v1(30.226,81.839) 30.56,82.173 DD2.18
  Bottom Layer w0.076: v1(30.226,81.839) 32.461,84.074 48.895,84.074 X2.4
INHA: DD1.20 DD2.12 | length 56.4
  Top Layer w0.076: v1(26.467,49.53) 27.013,48.984 DD1.20 ; DD2.12 30.309,75.584 32.766,73.127 32.766,65.888 32.08,65.202 v1(32.08,59.792)
  Bottom Layer w0.076: v1(26.467,49.53) 22.784,45.847 17.335,45.847 16.993,46.19 16.993,52.324 24.46,59.792 v1(32.08,59.792)
INHB: DD1.19 DD2.13 | length 44.5
  Top Layer w0.076: DD1.19 27.413,50.383 27.855,50.825 30.505,50.825 30.53,50.851 30.53,52.463 32.233,54.165 34.684,54.165 38.329,57.81 38.329,62.636 37.973,62.992 35.611,62.992 34.747,63.856 34.747,68.51 34.963,68.726 34.963,71.234 34.747,71.45 34.747,79.311 34.386,79.673 DD2.13
INHC: DD1.18 DD2.41 | length 54.5
  Top Layer w0.076: v1(20.739,83.566) 21.132,83.173 DD2.41 ; DD1.18 27.813,49.809 28.423,50.419 30.836,50.419 33.02,52.603 v1(33.02,53.238)
  Bottom Layer w0.076: v1(20.739,83.566) 20.396,83.223 20.396,73.965 17.97,71.539 17.97,70.904 19.736,69.139 28.067,69.139 34.09,63.116 34.09,54.308 v1(33.02,53.238)
INLA: DD1.23 DD2.26 | length 56.1
  Top Layer w0.076: v1(21.438,78.537) 22.263,77.711 22.263,75.859 23.304,74.818 23.304,48.679 24.956,47.028 DD1.23 ; v1(29.591,91.072) 29.809,90.854 DD2.26
  Bottom Layer w0.076: v1(21.438,78.537) 21.438,80.353 24.93,83.845 26.873,83.845 27.165,84.138 28.689,84.138 29.743,85.192 29.743,90.919 v1(29.591,91.072)
INLB: DD1.22 DD2.27 | length 57.5
  Top Layer w0.076: v1(24.409,49.505) 25.552,48.362 25.552,47.428 DD1.22 ; v1(28.13,81.483) 28.13,82.438 29.309,83.617 DD2.27
  Bottom Layer w0.076: v1(24.409,49.505) 24.409,50.102 24.956,50.648 32.283,50.648 34.42,52.784 34.42,64.742 29.591,69.571 25.273,69.571 24.943,69.901 24.943,72.492 25.273,72.822 26.289,72.822 26.746,73.279 26.746,78.547 28.13,79.931 v1(28.13,81.483)
INLC: DD1.21 DD2.28 | length 57.4
  Top Layer w0.076: DD1.21 26.613,48.569 25.908,48.569 25.54,48.937 25.54,50.102 26.594,51.156 30.023,51.156 30.048,51.181 30.048,54.229 30.95,55.131 34.48,55.131 37.973,58.623 37.973,61.989 37.655,62.306 34.48,62.306 34.087,62.7 34.087,68.663 34.633,69.209 34.633,70.911 34.087,71.457 34.087,75.799 30.498,79.388 29.718,79.388 28.867,80.239 27.546,80.239 27.203,80.581 27.203,82.786 28.809,84.391 DD2.28
LSS: DD1.17 R21.1 VD6.2 VD14.2 VT2.2 VT6.2 | length 171
  Top Layer w0.076: DD1.17 28.213,49.149 28.797,49.733 30.734,49.733 32.791,51.791 v1(34.76,51.791) ; v1(78.791,67.853) v1@78.791,68.148 ; VD14.2 VD14.2@83.86,5.08
  Top Layer w1.2: R21.1 65.83,1.841 66.909,0.762 76.581,0.762 77.581,1.762 VT6.2 78.756,2.175 81.438,4.857 83.303,4.857 VD14.2 ; v1(75.584,67.361) 75.597,67.374 76.01,67.374 77.581,68.945 VT2.2 ; v1@78.791,68.148 VT2.2 ; VD14.2@83.86,5.08 v1(87.376,5.08) ; VD6.2 80.799,69.255 80.696,69.358 VT2.2 ; v1(87.087,61.366) 87.087,58.62 87.376,58.331 v1(87.376,24.126)
  Bottom Layer w0.076: v1(78.791,67.853) v1@78.938,67.853 ; 85.425,61.366 v1(87.087,61.366)
  Bottom Layer w1.2: v1(34.76,51.791) 36.589,53.619 56.286,53.619 70.028,67.361 v1(75.584,67.361) ; v1@78.823,67.853 78.814,67.844 78.814,67.83 85.264,61.38 87.074,61.38 v1(87.087,61.366) ; v1(87.376,5.08) v1(87.376,24.126)
NetC1_1: C1.1 DD1.2 | length 4.1
  Top Layer w0.076: C1.1 27.013,40.138 DD1.2
NetC1_2: C1.2 DD1.3 | length 4.3
  Top Layer w0.076: DD1.3 27.416,44.225 27.416,42.772 27.813,42.375 C1.2@27.813,40.121
NetC2_1: C2.1 DD1.4 | length 5.1
  Top Layer w0.076: DD1.4 27.813,42.842 30.143,40.512 C2.1
NetC3_1: C3.1 DD1.5 | length 12.2
  Top Layer w0.076: DD1.5 28.213,43.263 30.937,40.538 34.366,40.538 34.722,40.894 34.722,42.291 34.696,42.316 33.382,42.316 33.357,42.291 C3.1
NetC4_1: C4.1 DD1.9 | length 8.8
  Top Layer w0.076: DD1.9 31.401,45.428 32.481,44.348 34.366,44.348 34.722,44.704 34.696,45.999 33.357,45.974 C4.1
NetC5_1: C5.1 DD2.7 SW1.2 | length 28.3
  Top Layer w0.076: v1(27.809,73.749) DD2.7 ; SW1.2@36.37,65.115 36.37,67.285 37.001,67.916 C5.1
  Bottom Layer w0.076: v1(27.809,73.749) 30.044,71.514 31.166,71.514 32.592,70.087 32.592,68.893 36.37,65.115 SW1.2@42.37,65.115
NetC6_1: C6.1 DD1.13 | length 5
  Top Layer w0.076: DD1.13 30.484,47.028 30.825,47.369 30.825,48.16 30.861,48.197 33.217,48.197 33.357,48.057 C6.1
NetC20_1: C20.1 L1.2 U1.1 | length 12.3
  Top Layer w0.076: U1.1 31.135,23.241 31.623,22.753 ; C20.1 31.941,22.435 31.623,22.753 ; L1.2 31.623,25.401 31.623,22.753
NetC21_1: C21.1 R20.1 ZQ1.1 | length 9.5
  Top Layer w0.076: R20.1 31.496,68.928 31.514,68.91 ZQ1.1 31.514,64.186 31.54,64.16 C21.1
NetC25_1: C25.1 L2.2 U2.1 | length 17.7
  Top Layer w0.06: 30.709,5.588 30.88,5.417
  Top Layer w0.076: U2.1 30.709,5.588 ; 30.88,5.417 C25.1 ; v1(35.56,10.338) 36.525,11.303 L2.2
  Bottom Layer w0.076: U2.1 32.563,10.338 v1(35.56,10.338)
NetDD1_24: DD1.24 R1.1 | length 4
  Top Layer w0.076: R1.1 22.428,47.835 23.635,46.628 DD1.24
NetDD2_2: DD2.2 R2.2 | length 12.5
  Top Layer w0.076: R2.2 19.431,71.247 v1(20.345,72.161) ; v1(24.892,75.463) 25.309,75.88 DD2.2
  Bottom Layer w0.076: v1(20.345,72.161) 20.345,73.215 22.593,75.463 v1(24.892,75.463)
NetDD2_3: DD2.3 R3.2 | length 10.8
  Top Layer w0.076: R3.2 22.022,71.247 22.047,71.272 v1(22.047,73.56) ; DD2.3 25.809,76.391 25.819,76.38 v1(25.819,73.878)
  Bottom Layer w0.076: v1(22.047,73.56) 22.365,73.878 v1(25.819,73.878)
NetDD2_44: DD2.44 R5.1 | length 14.3
  Top Layer w0.076: R5.1 16.625,84.621 15.126,83.121 15.126,81.379 15.352,81.153 20.434,81.153 20.954,81.673 DD2.44
NetR2_1: R2.1 VD2.1 | length 4.3
  Top Layer w0.076: VD2.1 17.272,68.199 17.399,68.326 R2.1
NetR3_1: R3.1 VD3.1 | length 4.4
  Top Layer w0.076: VD3.1 R3.1
NetR4_2: R4.2 VD1.1 | length 7.9
  Top Layer w0.076: R4.2 73.576,98.639 VD1.1
NetR6_2: R6.2 VD1.2 VT1.1 | length 13.2
  Top Layer w0.076: R6.2 73.127,86.189 73.314,86.376 VT1.1 75.454,89.789 76.81,91.145 76.81,93.639 VD1.2
NetR7_2: R7.2 VD5.1 | length 9.4
  Top Layer w0.076: R7.2 70.993,79.272 73.85,82.129 VD5.1
NetR8_2: R8.2 VD5.2 VT2.1 | length 13.1
  Top Layer w0.076: R8.2 73.177,69.171 73.364,69.358 VT2.1 75.581,73.422 77.089,74.93 VD5.2
NetR10_2: R10.2 VD7.1 | length 9
  Top Layer w0.076: R10.2 76.391,60.833 76.708,61.151 VD7.1
NetR12_2: R12.2 VD7.2 VT3.1 | length 11.5
  Top Layer w0.076: R12.2 73.381,52.915 73.441,52.975 VT3.1 75.708,56.658 76.708,57.658 VD7.2
NetR14_2: R14.2 VD9.1 | length 6.8
  Top Layer w0.076: R14.2 73.659,48.347 VD9.1
NetR15_2: R15.2 VD9.2 VT4.1 | length 12.7
  Top Layer w0.076: R15.2 72.032,36.084 VT4.1 75.581,37.033 75.459,37.156 75.459,39.975 76.708,41.224 VD9.2
NetR16_2: R16.2 VD11.1 | length 7.3
  Top Layer w0.076: R16.2 76.073,28.956 76.581,29.464 VD11.1
NetR17_2: R17.2 VD11.2 VT5.1 | length 12.3
  Top Layer w0.076: R17.2 74.327,20.955 VT5.1 75.708,23.384 76.581,24.257 VD11.2
NetR18_2: R18.2 VD13.1 | length 8.8
  Top Layer w0.076: R18.2 75.755,12.109 76.2,12.553 76.2,14.946 VD13.1
NetR19_2: R19.2 VD13.2 VT6.1 | length 13.7
  Top Layer w0.076: R19.2 74.752,3.004 VT6.1 75.581,3.124 75.359,3.347 75.359,6.22 76.708,7.569 VD13.2
NetVD10_2: VD10.2 VT4.2 | length 6.5
  Top Layer w0.076: VT4.2 78.494,36.997 VD10.2
OSC_IN: C18.1 DD2.5 ZQ1.2 | length 17.9
  Top Layer w0.076: C18.1 26.035,63.487 25.717,63.805 25.717,65.614 ZQ1.2 27.414,71.976 26.809,72.581 DD2.5
OSC_OUT: DD2.6 R20.2 | length 19
  Top Layer w0.076: v1(25.883,71.73) 23.965,73.647 23.965,77.533 24.317,77.885 24.317,79.126 24.359,79.168 27.288,79.168 27.309,79.146 DD2.6 ; v1(30.239,70.587) 31.07,71.418 R20.2
  Bottom Layer w0.076: v1(25.883,71.73) 27.026,70.587 v1(30.239,70.587)
PA0: DD2.10 X6.1 | length 40.8
  Top Layer w0.076: v1(28.677,64.719) 28.986,65.029 28.986,69.102 28.626,69.462 28.626,72.351 29.309,73.034 DD2.10
  Bottom Layer w0.076: X6.1 21.361,57.404 v1(28.677,64.719)
PA1: DD2.11 X6.2 | length 42.1
  Top Layer w0.076: v1(26.975,64.884) 28.13,63.729 29.299,63.729 29.642,64.072 29.642,69.137 28.956,69.823 28.956,71.449 29.809,72.302 DD2.11
  Bottom Layer w0.076: X6.2 22.034,59.944 v1(26.975,64.884)
PA4: DD2.14 X6.3 | length 51.2
  Top Layer w0.076: v1(30.582,64.16) 30.251,64.491 30.251,69.262 29.286,70.227 29.286,71.247 30.556,72.517 v1(30.861,72.517) ; DD2.14 35.143,80.173 35.687,79.629 v1(35.687,77.343)
  Bottom Layer w0.076: X6.3 19.71,62.484 23.774,66.548 28.194,66.548 v1(30.582,64.16) ; v1(30.861,72.517) v1(35.687,77.343)
PA8: DD2.29 X6.4 | length 54.5
  Top Layer w0.076: DD2.29 28.309,88.278 v1(28.804,88.773)
  Bottom Layer w0.076: X6.4 5.893,66.218 5.893,82.067 5.791,82.169 4.101,82.169 3.784,82.486 3.784,86.614 4.318,87.148 5.333,87.148 5.867,86.614 5.867,86.182 6.794,85.255 9.563,85.255 10.135,85.827 11.834,85.827 12.24,85.42 18.224,85.42 18.656,85.852 18.656,86.614 18.986,86.944 26.975,86.944 v1(28.804,88.773)
PA9: DD2.30 X6.5 | length 49.9
  Top Layer w0.076: X6.5 5.691,68.556 5.691,73.736 3.784,75.643 3.784,82.042 3.81,82.068 6.668,82.068 8.357,83.757 8.357,85.293 v1(7.417,86.233) ; DD2.30 v1(27.809,89.992)
  Bottom Layer w0.076: v1(7.417,86.233) 7.493,86.157 12.954,86.157 13.36,85.75 17.941,85.75 18.326,86.136 18.326,87.249 18.351,87.274 25.091,87.274 v1(27.809,89.992)
PA10: DD2.31 X6.6 | length 42.6
  Top Layer w0.076: X6.6 3.454,71.349 3.454,82.372 3.48,82.398 5.5,82.398 v1(7.429,84.328) ; DD2.31 27.309,85.518 v1(27.749,85.077)
  Bottom Layer w0.076: v1(7.429,84.328) 9.211,84.328 10.38,85.496 11.697,85.496 12.103,85.09 18.888,85.09 18.986,85.189 18.986,86.465 19.135,86.614 26.213,86.614 v1(27.749,85.077)
PA15: DD2.38 X6.7 | length 42.8
  Top Layer w0.076: v1(21.794,90.17) 21.794,84.709 DD2.38
  Bottom Layer w0.076: X6.7 3.429,73.914 3.429,87.148 3.759,87.478 9.994,87.478 10.986,86.487 13.105,86.487 13.511,86.081 17.018,86.081 17.488,86.55 17.488,87.071 20.587,90.17 v1(21.794,90.17)
PB1: DD2.19 X6.8 | length 75
  Top Layer w0.076: X6.8 9.03,57.925 9.03,81.801 9.347,82.118 9.347,85.077 10.351,86.081 12.573,86.081 12.979,86.487 v1(12.979,91.135) ; DD2.19 33.706,82.673 35.204,84.171 35.204,85.496 v1(36.271,86.563)
  Bottom Layer w0.076: v1(12.979,91.135) 13.348,91.504 22.796,91.504 26.594,91.338 27.838,92.583 35.75,92.583 36.271,92.062 v1(36.271,86.563)
PB2: DD2.20 X6.9 | length 66.6
  Top Layer w0.076: X6.9 8.7,60.134 8.7,82.398 9.017,82.715 9.017,85.471 v1(11.582,88.036) ; DD2.20 33.729,83.173 34.874,84.318 v1(34.874,87.706)
  Bottom Layer w0.076: v1(11.582,88.036) 12.793,88.036 14.418,86.411 16.637,86.411 17.158,86.931 17.158,87.574 20.757,91.173 22.542,91.173 22.72,90.995 28.143,90.995 29.4,92.253 30.327,92.253 v1(34.874,87.706)
PB3: DD2.39 X6.10 | length 40.2
  Top Layer w0.076: v1(20.244,85.039) 20.561,85.039 21.095,84.506 21.486,84.506 21.819,84.173 DD2.39
  Bottom Layer w0.076: X6.10 4,61.214 3.683,61.531 3.683,63.233 4,63.551 4.75,63.551 6.223,65.024 6.223,72.326 6.54,72.644 10.867,72.644 19.812,81.589 19.812,84.607 v1(20.244,85.039)
PB4: DD2.40 X6.11 | length 36.7
  Top Layer w0.076: v1(7.137,80.01) 7.137,77.851 8.255,76.733 8.255,64.77 X6.11 ; v1(18.923,83.464) 19.964,84.506 21.488,84.506 21.793,84.201 21.793,83.698 21.819,83.673 DD2.40
  Bottom Layer w0.076: v1(7.137,80.01) 17.348,80.01 18.923,81.585 v1(18.923,83.464)
PB10: DD2.21 X6.12 | length 65.5
  Top Layer w0.076: v1(30.226,80.315) 29.286,81.255 29.286,82.855 30.104,83.673 DD2.21 ; v1(33.147,62.636) 33.147,69.418 v1(33.706,69.977)
  Bottom Layer w0.076: X6.12 7.899,66.954 29.667,66.954 33.147,63.475 v1(33.147,62.636) ; v1(30.226,80.315) 33.503,83.591 37.02,83.591 37.338,83.274 37.338,73.609 v1(33.706,69.977)
PB11: DD2.22 X6.13 | length 56.6
  Top Layer w0.076: v1(19.431,76.073) 19.456,76.048 v1(21.336,76.048) ; DD2.22 33.78,84.173 34.544,84.937 34.544,86.564 33.909,87.198 33.909,88.201 34.341,88.633 36.767,88.633 37.376,88.024 37.376,83.629 v1(36.398,82.652)
  Bottom Layer w0.076: X6.13 12.192,68.834 v1(19.431,76.073) ; v1(21.336,76.048) 23.515,76.048 26.971,79.504 26.971,81.682 28.016,82.728 28.778,82.728 29.299,82.207 29.299,79.629 29.68,79.248 32.995,79.248 v1(36.398,82.652)
phase_A: C3.2 DD1.6 VD4.2 VD6.1 VT1.2 VT2.3 X3.2 | length 137.3
  Top Layer w0.076: DD1.6 28.613,43.358 31.077,40.894 32.156,40.894 ; v1(30.836,42.215) 32.156,40.894 ; C3.2 34.207,41.212 33.889,40.894 32.156,40.894 ; 82.931,75.271 VD6.1 VD6.1@84.455,74.255 ; v1@84.455,71.806 v1(84.658,71.603)
  Top Layer w1.2: VT2.3 79.478,74.255 VD6.1 ; VT1.2 78.192,85.638 VD4.2 82.931,75.271 ; v1@84.455,71.806 VD6.1@84.455,74.255
  Bottom Layer w1.2: v1(30.836,42.215) 81.171,42.215 X3.2 95.885,56.929 95.885,71.814 95.182,72.517 85.573,72.517 v1(84.658,71.603)
phase_B: C4.2 C6.2 DD1.10 DD1.14 VD8.2 VD10.1 VT3.2 VT4.3 X3.3 | length 139.3
  Top Layer w0.076: DD1.10 30.835,45.828 ; DD1.14 30.124,47.428 30.378,47.682 30.378,48.501 30.404,48.527 32.36,48.527 33.007,49.174 34.182,49.174 34.207,49.149 C6.2 ; C4.2 34.207,45.085 33.801,44.679 32.946,44.679 31.796,45.828 30.835,45.828 ; v1(43.84,48.108) 43.434,48.514 C6.2 ; VD10.1 VD10.1@83.785,41.997 ; 95.377,64.313 95.58,64.313 ; 30.835,45.828 30.974,45.968 32.685,45.968 33.047,46.33 34.48,46.33 34.925,46.774 34.925,47.917 34.48,48.362 34.207,48.362 C6.2
  Top Layer w1.2: VT4.3 80.494,41.997 VD10.1 ; VT3.2 80.366,52.975 80.39,52.999 VD8.2 ; VD10.1@83.785,41.997 83.785,47.075 83.058,47.803 VD8.2 ; X3.3 93.726,62.459 94.183,62.916 94.494,62.916 95.58,64.002 95.58,64.313 95.58,65.769 94.674,66.675 88.722,66.675 85.598,63.551 85.598,56.642 83.058,54.102 VD8.2
  Bottom Layer w0.076: v1(43.84,48.108) 44.272,48.108 45.085,47.295 49.174,47.295 51.816,49.936 58.191,49.936 67.031,58.776 92.732,58.776 X3.3
phase_C: VD12.2 VD14.1 VT5.2 VT6.3 X3.4 | length 77.2
  Top Layer w0.076: VD14.1@82.653,10.247 VD14.1
  Top Layer w1.2: VT6.3 77.621,4.175 82.793,9.347 82.793,9.847 83.193,10.247 VD14.1 83.693,14.402 83.312,14.783 VD12.2 ; VT5.2 78.319,18.963 VD12.2 ; X3.4 90.221,61.265 90.221,23.467 85.716,18.963 VD12.2
SCL1: DD2.42 X7.3 | length 20.6
  Top Layer w0.076: v1(17.577,82.512) 20.892,82.512 21.053,82.673 DD2.42
  Bottom Layer w0.076: X7.3 6.198,84.734 6.198,83.426 6.54,83.083 17.005,83.083 v1(17.577,82.512)
SCL2: DD2.45 X8.3 | length 24.5
  Top Layer w0.076: DD2.45 24.308,81.198 24.308,85.623 23.8,86.131 23.8,91.923 v1(24.638,92.761)
  Bottom Layer w0.076: X8.3 18.618,92.761 v1(24.638,92.761)
SDA1: DD2.43 X7.2 | length 19.3
  Top Layer w0.076: v1(16.053,82.093) 16.561,81.585 19.431,81.585 20.019,82.173 DD2.43
  Bottom Layer w0.076: X7.2 5.817,82.575 15.57,82.575 v1(16.053,82.093)
SDA2: DD2.46 X8.2 | length 33.9
  Top Layer w0.076: v1(16.231,87.338) 16.231,84.925 14.795,83.49 14.795,81.14 15.113,80.823 21.618,80.823 21.768,80.673 DD2.46
  Bottom Layer w0.076: X8.2 11.379,97.46 8.865,97.46 8.839,97.434 8.839,92.278 12.344,88.773 14.795,88.773 v1(16.231,87.338)
SWCLK: DD2.37 X6.14 | length 40.2
  Top Layer w0.076: v1(12.992,71.691) 13.805,72.504 13.805,84.51 14.63,85.335 14.63,90.742 15.075,91.186 22.657,91.186 23.063,90.78 23.063,85.173 DD2.37
  Bottom Layer w0.076: X6.14 12.967,71.374 12.992,71.399 v1(12.992,71.691)
SWDIO: DD2.34 X6.15 | length 44.5
  Top Layer w0.076: v1(11.608,75.133) 11.608,71.056 11.925,70.739 13.818,70.739 14.135,71.056 14.135,83.994 14.961,84.82 14.961,88.519 15.342,88.9 20.218,88.9 v1(20.853,88.265) ; v1(25.4,90.068) 25.809,89.659 DD2.34
  Bottom Layer w0.076: X6.15 8.458,75.133 v1(11.608,75.133) ; v1(20.853,88.265) 23.597,88.265 v1(25.4,90.068)
VDSLVL: C9.1 C9.2 DD1.26 R9.1 R13.2 | length 26.2
  Top Layer w0.076: v1(17.932,46.787) 22.599,46.787 23.133,46.253 23.933,46.253 24.359,45.828 DD1.26 ; R9.1 25.361,52.349 v1(26.626,52.984) C9.2 C9.1 27.476,53.042 R13.2
  Bottom Layer w0.076: v1(17.932,46.787) 24.13,52.984 v1(26.626,52.984)
pads on no net: DD1.25 DD1.29 DD2.1 DD2.4 X4.13

## Polygon pours and split planes (outlines as drawn)
no net on Bottom Layer "NONET_L-01_P-001" (solid, pour order 1): 105,102.5 105,-2.5 0,-2.5 0,102.5
no net on Top Layer "NONET_L-01_P-001" (solid, pour order 0): 0,-2.5 0,102.5 105,102.5 105,-2.5

## Other copper
Top Layer:
  text "String" at 56.134,104.14 h1.52
  text "String" at 61.468,101.346 h1.52
  text "String" at 70.993,101.219 h1.52
Multi-Layer:
  text "+5V" at 10.541,100.584 h0.7 r180
  text "SDA2" at 13.589,100.584 h0.7 r180
  text "SCL2" at 16.637,100.584 h0.7 r180
  text "+5V" at 54.61,100.584 h0.7 r180
  text "HPA" at 57.023,100.584 h0.7 r180
  text "HPB" at 59.69,100.584 h0.7 r180
  text "HPC" at 62.23,100.584 h0.7 r180
  text "GND" at 64.77,100.584 h0.7 r180
  text "GND" at 19.146,100.546 h0.7 r180
  text "+5V" at 39.243,100.457 h0.7 r180
  text "DO" at 41.275,100.457 h0.7 r180
  text "CLK" at 44.069,100.457 h0.7 r180
  text "GND" at 46.736,100.457 h0.7 r180
  text "GND" at 0.754,89.546 h0.7 r270
  text "SCL1" at 0.854,87.046 h0.7 r270
  text "SDA1" at 0.854,84.146 h0.7 r270
  text "+5V" at 0.954,81.146 h0.7 r270
  text "SWDIO" at 0.754,75.046 h0.7 r270
  text "GND" at 101.1,68.8 h0.7 r90
  text "C" at 100.746,64.754 h0.7 r90
  text "B" at 100.746,59.554 h0.7 r90
  text "PB1" at 0.954,56.846 h0.7 r270
  text "A" at 100.846,54.654 h0.7 r90
  text "+24V" at 101.046,48.454 h0.7 r90
  text "GND" at 57.531,0.603 h0.7
  text "GND" at 10.414,0.508 h0.7
  text "CANL" at 12.954,0.508 h0.7
  text "CANH" at 16.129,0.508 h0.7
  text "+24V" at 51.689,0.508 h0.7

## Silkscreen, mask and mechanical layers (free items; w line width, h text height)
Board Shape:
  lines w0.254: 0,0 0,101.092 ; 0,0 0,-2.5 105,-2.5 105,102.5 0,102.5 0,101.092 ; 0,0 100.076,0 100.076,101.092 0,101.092 ; 0,0 0,101.092